# Altium PCB PCB Band Pass.PcbDoc
Units mm, origin at the board's own origin, x right, y up, seen from the top; angles counter-clockwise.
Board outline 60 x 60 mm, 2 copper layers (Top Layer, Bottom Layer); 59 components, 42 nets, 176 pads, 17 vias.
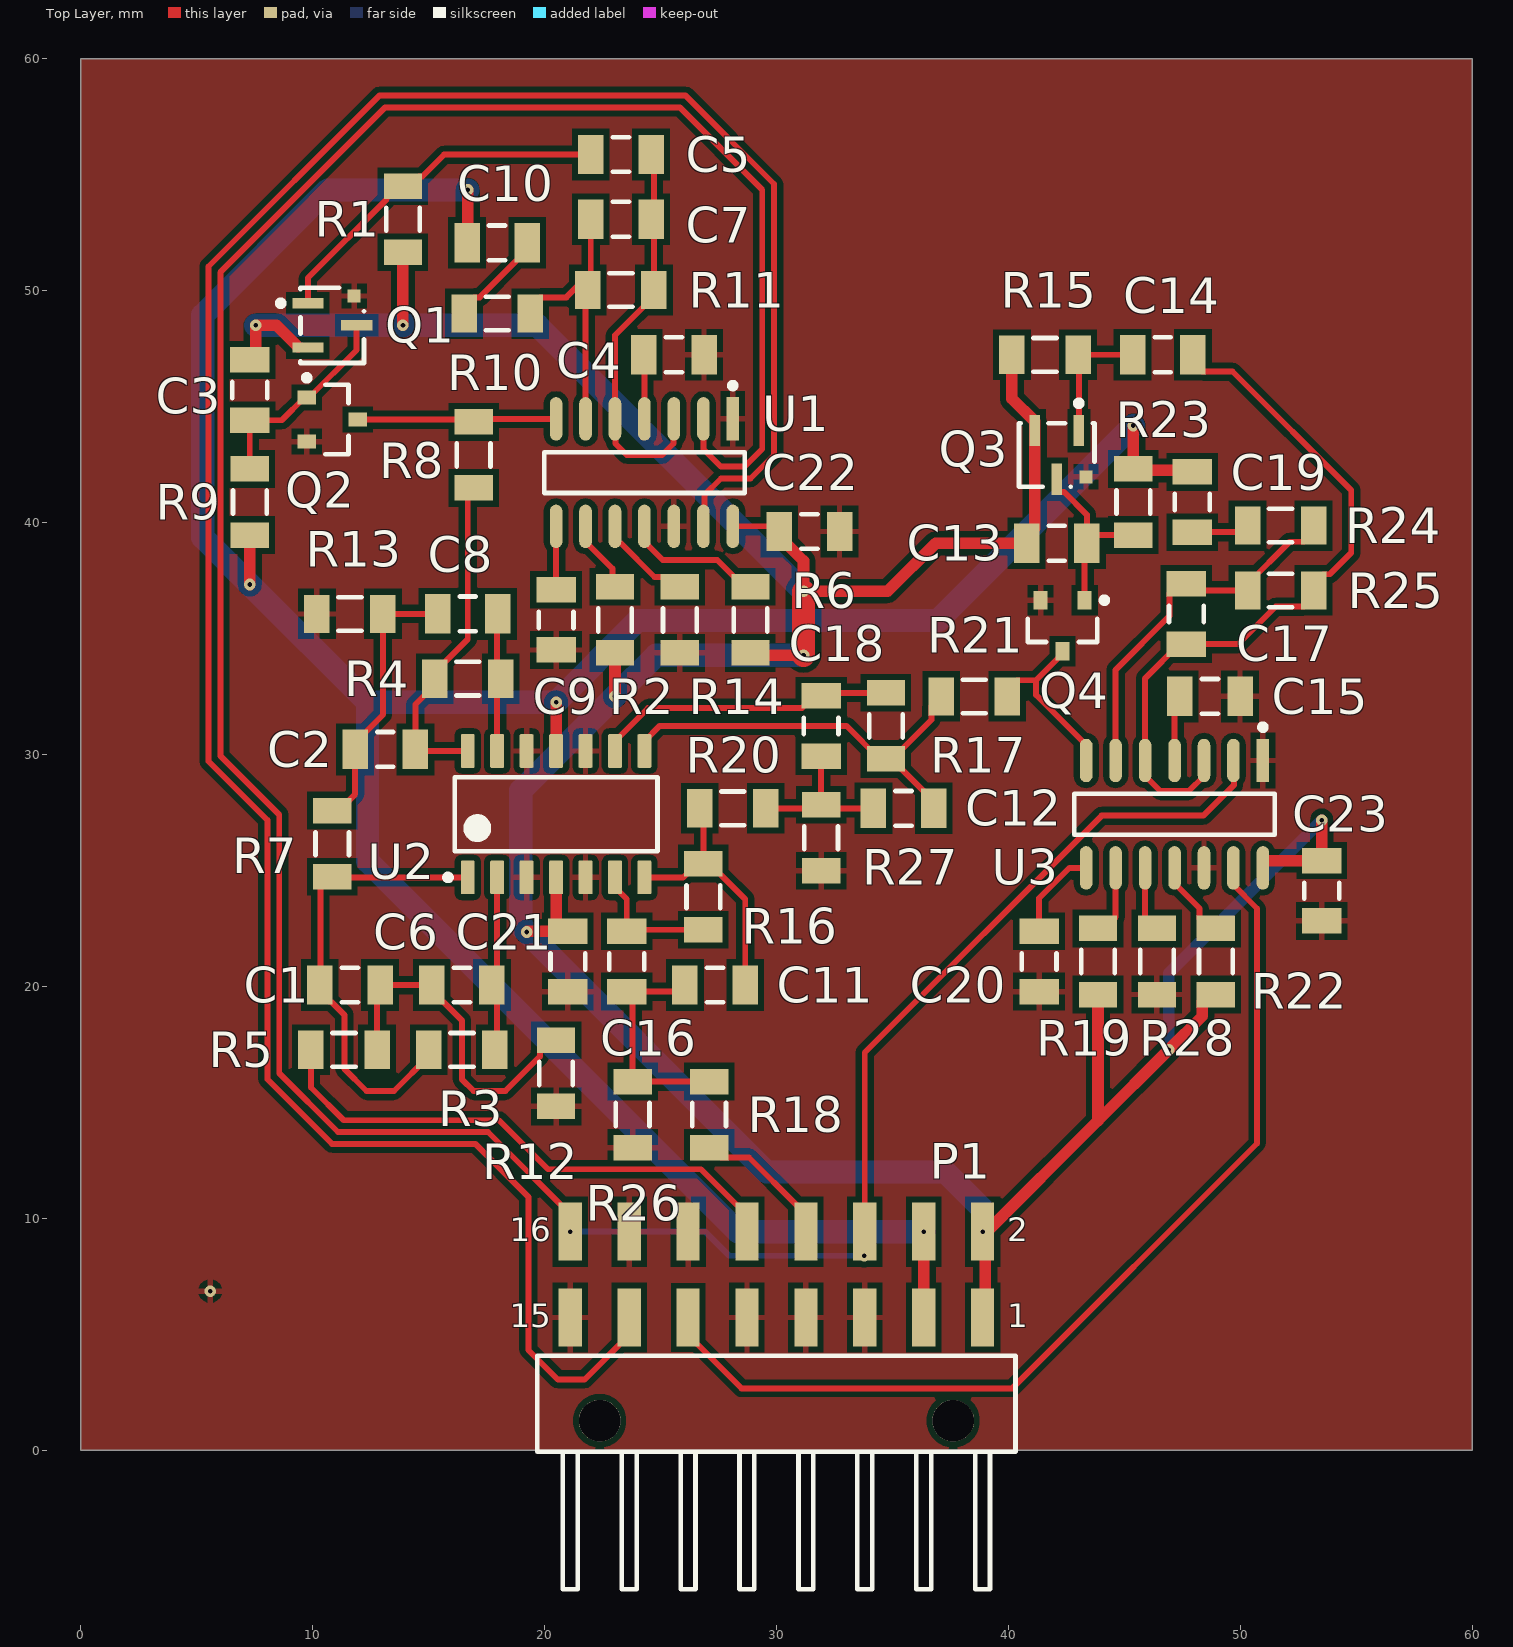
[diagram p0: Top Layer view]
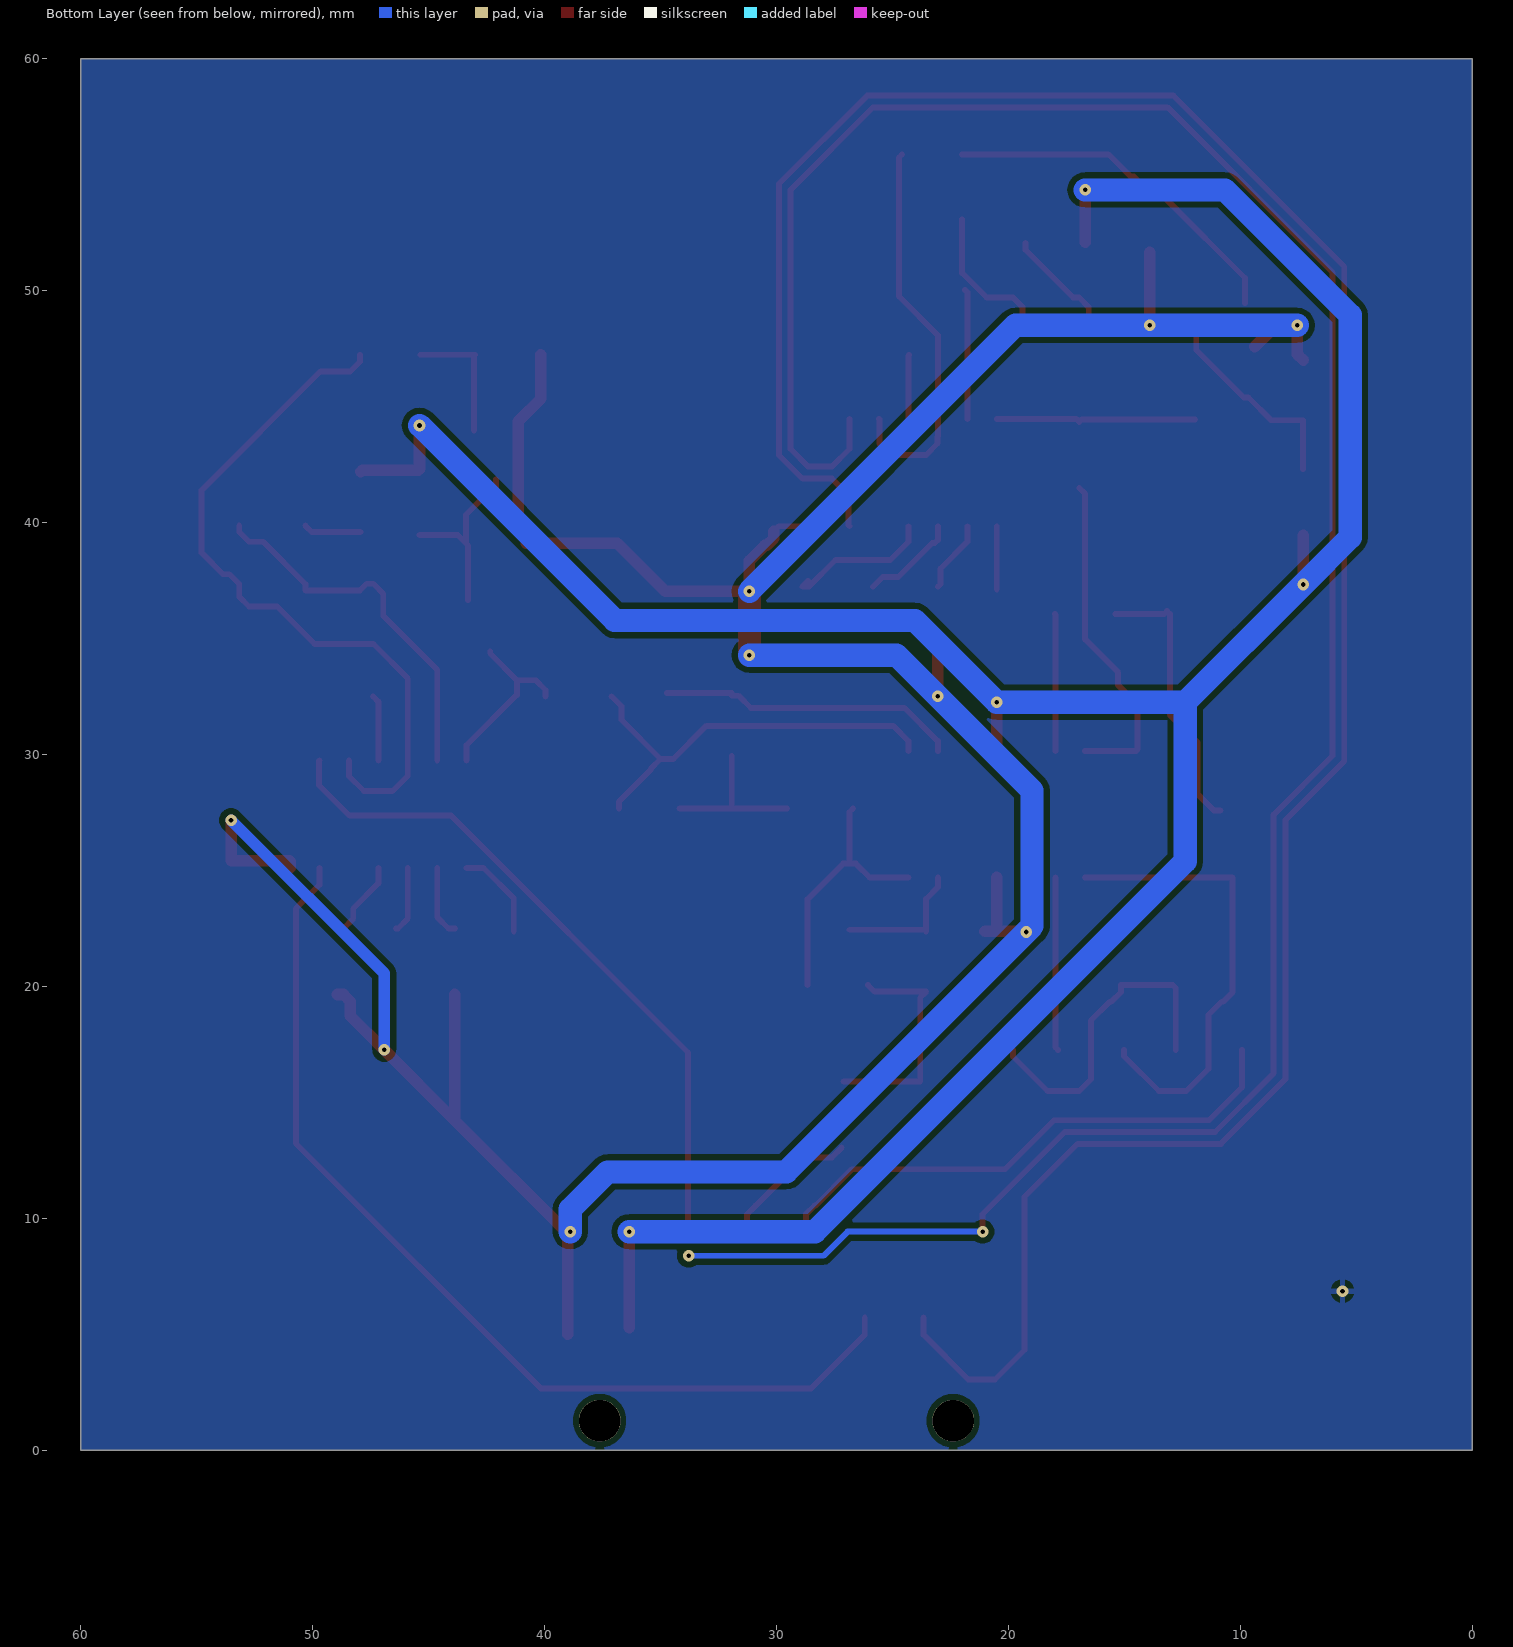
[diagram p1: Bottom Layer view, seen from below]

## Layer stack, top to bottom
Top Solder: solder mask 0.0102, Solder Resist, Dk 3.5
Top Layer: signal copper 0.0356
Dielectric 1: dielectric 0.32, FR-4, Dk 4.8
Bottom Layer: signal copper 0.0356
Bottom Solder: solder mask 0.0102, Solder Resist, Dk 3.5

## Board outline
0,0 0,60 60,60 60,0

## Design rules (kind name [scope] priority, off if disabled: settings)
Clearance [All] p1: gap=0.254 ignorepadtopadclearanceinfootprint=FALSE except(0: Arc-Hole Track-Hole SMDPad-Hole THPad-Hole Via-Hole Fill-Hole Poly-Hole Region-Hole Text-Hole)
PolygonConnect [All] p1: connectstyle=Relief reliefconductorwidth=0.254 reliefentries=4 polygonreliefangle="90 Angle" airgapwidth=0.254
RoutingVias [All] p1: holewidth=0.711 width=1.27 viastyle="Through Hole" minholewidth=0.711 minwidth=1.27 maxholewidth=0.711 maxwidth=1.27
SolderMaskExpansion [All] p1: expansion=0.102 istentingtop=FALSE
Width [All] p1: maxlimit=10 minlimit=0.254 preferedwidth=0.254 minimp=50.000000 maximp=50.000000 favimp=50.000000
30 further rules are at their usual default settings.

## Components (designator, comment, footprint, x,y, rotation, side; value= is the part's Value field where it differs from the comment)
C1 "1206GC102KAT1A" AVX-1206-2_L 11.608,20.056 r180 top
C2 "1206GC102KAT1A" AVX-1206-2_L 13.132,30.216 r0 top
C3 "1206GC102KAT1A" AVX-1206-2_L 7.29,45.71 r270 top
C4 "1206GC102KAT1A" AVX-1206-2_L 25.578,47.234 r180 top
C5 "1206GC102KAT1A" AVX-1206-2_L 23.292,55.87 r0 top
C6 "1206GC102KAT1A" AVX-1206-2_L 16.434,20.056 r0 top
C7 "1206GC102KAT1A" AVX-1206-2_L 23.292,53.076 r0 top
C8 "1206GC102KAT1A" AVX-1206-2_L 16.688,36.058 r0 top
C9 "1206GC102KAT1A" AVX-1206-2_L 20.498,35.804 r90 top
C10 "1206GC102KAT1A" AVX-1206-2_L 17.958,52.06 r0 top
C11 "1206GC102KAT1A" AVX-1206-2_L 27.356,20.056 r0 top
C12 "1206GC102KAT1A" AVX-1206-2_L 35.484,27.676 r0 top
C13 "1206GC102KAT1A" AVX-1206-2_L 42.088,39.106 r0 top
C14 "1206GC102KAT1A" AVX-1206-2_L 46.66,47.234 r0 top
C15 "1206GC102KAT1A" AVX-1206-2_L 48.692,32.502 r180 top
C16 "1206GC102KAT1A" AVX-1206-2_L 23.546,21.072 r90 top
C17 "1206GC102KAT1A" AVX-1206-2_L 47.676,36.058 r270 top
C18 "1206GC102KAT1A" AVX-1206-2_L 31.928,31.232 r90 top
C19 "1206GC102KAT1A" AVX-1206-2_L 47.93,40.884 r270 top
C20 "1206GC102KAT1A" AVX-1206-2_L 41.326,21.072 r90 top
C21 "1206GC102KAT1A" AVX-1206-2_L 21.006,21.072 r90 top
C22 "1206GC102KAT1A" AVX-1206-2_L 31.42,39.614 r180 top
C23 "1206GC102KAT1A" AVX-1206-2_L 53.518,24.12 r90 top
P1 "610116249121" 610116249121 30,2 r0 top
Q1 "2N2907AUB" FP-UB-IPC_C 10.846,48.504 r270 top
Q2 "2N7002-T1-E3" VISH-TO-236-3_A_L 10.846,44.44 r0 top
Q3 "2N2907AUB" FP-UB-IPC_C 42.088,42.916 r180 top
Q4 "2N7002-T1-E3" VISH-TO-236-3_A_L 42.342,35.55 r270 top
R1 "ERJ-8GEY0R00V" RESC3216X70X50NL05T20 13.894,53.076 r270 top
R2 "ERJ-8GEY0R00V" RESC3216X70X50NL05T20 23.038,35.804 r270 top
R3 "ERJ-8GEY0R00V" RESC3216X70X50NL05T20 16.434,17.262 r180 top
R4 "ERJ-8GEY0R00V" RESC3216X70X50NL05T20 16.688,33.264 r180 top
R5 "ERJ-8GEY0R00V" RESC3216X70X50NL05T20 11.354,17.262 r0 top
R6 "ERJ-8GEY0R00V" RESC3216X70X50NL05T20 28.88,35.804 r270 top
R7 "ERJ-8GEY0R00V" RESC3216X70X50NL05T20 10.846,26.152 r90 top
R8 "ERJ-8GEY0R00V" RESC3216X70X50NL05T20 16.942,42.916 r90 top
R9 "ERJ-8GEY0R00V" RESC3216X70X50NL05T20 7.29,40.884 r90 top
R10 "ERJ-8GEY0R00V" RESC3216X70X50NL05T20 17.958,49.012 r0 top
R11 "ERJ-8GEY0R00V" RESC3216X70X50NL05T20 23.292,50.028 r0 top
R12 "ERJ-8GEY0R00V" RESC3216X70X50NL05T20 20.498,16.246 r90 top
R13 "ERJ-8GEY0R00V" RESC3216X70X50NL05T20 11.608,36.058 r0 top
R14 "ERJ-8GEY0R00V" RESC3216X70X50NL05T20 25.832,35.804 r90 top
R15 "ERJ-8GEY0R00V" RESC3216X70X50NL05T20 41.58,47.234 r180 top
R16 "ERJ-8GEY0R00V" RESC3216X70X50NL05T20 26.848,23.866 r90 top
R17 "ERJ-8GEY0R00V" RESC3216X70X50NL05T20 34.722,31.232 r270 top
R18 "ERJ-8GEY0R00V" RESC3216X70X50NL05T20 27.102,14.468 r90 top
R19 "ERJ-8GEY0R00V" RESC3216X70X50NL05T20 43.866,21.072 r270 top
R20 "ERJ-8GEY0R00V" RESC3216X70X50NL05T20 28.118,27.676 r0 top
R21 "ERJ-8GEY0R00V" RESC3216X70X50NL05T20 38.532,32.502 r0 top
R22 "ERJ-8GEY0R00V" RESC3216X70X50NL05T20 48.946,21.072 r270 top
R23 "ERJ-8GEY0R00V" RESC3216X70X50NL05T20 45.39,40.884 r270 top
R24 "ERJ-8GEY0R00V" RESC3216X70X50NL05T20 51.74,39.868 r0 top
R25 "ERJ-8GEY0R00V" RESC3216X70X50NL05T20 51.74,37.074 r0 top
R26 "ERJ-8GEY0R00V" RESC3216X70X50NL05T20 23.8,14.468 r90 top
R27 "ERJ-8GEY0R00V" RESC3216X70X50NL05T20 31.928,26.406 r90 top
R28 "ERJ-8GEY0R00V" RESC3216X70X50NL05T20 46.406,21.072 r90 top
U1 "SSM2166SZ" FP-R-14-IPC_C 24.308,42.154 r270 top
U2 "TL074CDR" D0014A_N 20.498,27.422 r90 top
U3 "SSM2166SZ" FP-R-14-IPC_C 47.168,27.422 r270 top

## Footprints (in the part's own frame and the unit in brackets; to place one, negate y for a bottom-side part, rotate by r counter-clockwise, add the part's x,y. Pads: shape width x height; smd on the part's side, far side on the other; paste and mask are expansions set on the pad)
610116249121 [mm] "Pin Header, pitch 2.54 mm, SMD, Angled, dual row, 16p"
  rect 1x2.5 smd: 1(8.89,3.72) 2(8.89,7.42) 3(6.35,3.72) 4(6.35,7.42) 5(3.81,3.72) 6(3.81,7.42) 7(1.27,3.72) 8(1.27,7.42) 9(-1.27,3.72) 10(-1.27,7.42) 11(-3.81,3.72) 12(-3.81,7.42) 13(-6.35,3.72) 14(-6.35,7.42) 15(-8.89,3.72) 16(-8.89,7.42)
  round 1.8 hole 1.8 unplated: MH1(7.62,-0.73) MH2(-7.62,-0.73)
  silkscreen extent -10.31,-8 10.31,2.07, body extent -10.16,-8 10.16,8.16, height 5.1
AVX-1206-2_L [mm] "SMD, 2-Leads, Body 3.4x1.8mm, IPC High Density"
  rect 1.1x1.7 smd: 1(-1.3,0) 2(1.3,0)
  silkscreen extent -0.35,-0.75 0.35,0.75, body extent -1.7,-0.9 1.7,0.9, height 1.52
D0014A_N [mm] "SOIC, 14-Leads, Body 8.75x4mm, Pitch 1.27mm, IPC Medium Density"
  rrect17% 1.45x0.6 smd: 1(-2.725,3.81) 2(-2.725,2.54) 3(-2.725,1.27) 4(-2.725,0) 5(-2.725,-1.27) 6(-2.725,-2.54) 7(-2.725,-3.81) 8(2.725,-3.81) 9(2.725,-2.54) 10(2.725,-1.27) 11(2.725,0) 12(2.725,1.27) 13(2.725,2.54) 14(2.725,3.81)
  silkscreen extent -2.85,-4.38 1.6,4.78, body extent -3.02,-4.32 3.02,4.32, height 1.59
FP-R-14-IPC_C [mm]
  rect 1.874x0.542 smd paste+0 mask+0: 1(-2.316,3.81)
  rrect100% 1.874x0.542 smd paste+0 mask+0: 2(-2.316,2.54) 3(-2.316,1.27) 4(-2.316,0) 5(-2.316,-1.27) 6(-2.316,-2.54) 7(-2.316,-3.81) 8(2.316,-3.81) 9(2.316,-2.54) 10(2.316,-1.27) 11(2.316,0) 12(2.316,1.27) 13(2.316,2.54) 14(2.316,3.81)
  silkscreen extent -3.88,-4.33 0.88,4.33, body extent -3.35,-4.43 3.35,4.43, height 0.25
FP-UB-IPC_C [mm]
  rect 0.45x1.35 smd paste+0 mask+0: 1(-0.955,-1.05) 2(0.955,-1.05) 3(0,1.05)
  rect 0.559x0.559 smd paste+0 mask+0: 4(-1.263,0.945)
  silkscreen extent -1.63,-2.35 1.63,1.37, body extent -1.73,-1.83 1.73,1.83, height 0.25
RESC3216X70X50NL05T20 [mm] "Chip Resistor, 2-Leads, Body 3.20x1.60mm, IPC Medium Density"
  rect 1.1x1.65 smd: 1(-1.425,0) 2(1.425,0)
  silkscreen extent -0.5,-0.72 0.5,0.72, body extent -1.63,-0.82 1.62,0.82, height 0.7
VISH-TO-236-3_A_L [mm] "SOT-23, 3-Leads, Body 3.04x1.4mm, Pitch 0.95mm, IPC High Density"
  rect 0.8x0.6 smd: 1(-1.1,0.95) 2(-1.1,-0.95) 3(1.1,0)
  silkscreen extent -1.22,-1.5 0.7,1.92, body extent -1.32,-1.52 1.32,1.52, height 1.12

## Part data
C1 C2 C3 C4 C5 C6 C7 C8 C9 C10 C11 C12 C13 C14 C15 C16 C17 C18 C19 C20 C21 C22 C23: library part CMP-2000-05468-1, "Chip Capacitor, 1 nF, +/- 10%, -55 to 125 degC, 1206 (3216 Metric), RoHS, Tape and Reel", Capacitance=0.001uF, Case Size/Dimension=1206, Dielectric=X7R, Manufacturer=AVX, Package Description="2-Pin SMD, Body 3.4 x 1.8 mm", Rated Voltage=2000V, Tolerance=10%, Tolerance (%)=±10%, Datasheet URL=https://datasheet.ciiva.com/11787/0900766b80ed4c37-11787781.pdf, Datasheet Version=11/2010, Manufacturer URL=http://www.avx.com/, Mounting Technology=SurfaceMount, Package Reference=1206, PartNumber=1206GC102KAT1A, Voltage Rating DC=2000V
P1: library part CMP-1502-01151-2, Color=Black, Contact Resistance=20mΩ, Current Rating=3A, Operating Supply Voltage=250V, Connector Type="Male Pin", Contact Mating Length=5.9944mm, Contact Plating=Gold, Gender=Male, Lead Pitch=2.54mm, Mount="Surface Mount", NexarPartId=52645099, Number Of Contacts=16, Number of Pins=16, Number of Positions=16, Number of Rows=2, Packaging="Tape and Reel", Pitch=2.54mm, REACH SVHC=Unknown, RoHS=Compliant, Row Spacing=2.54mm, Termination=Solder
Q1 Q3: library part CMP-06567-000003-1, "TRANS PNP 60V 0.6A", Collector Base Voltage=60V, Collector Emitter Saturation Voltage=1.6V, Emitter Base Voltage=5V, Manufacturer=Microsemi, Max Collector Current=600mA, Max Junction Temp=+200°C, Package=UB, Power Dissipation=0.5W, Temperature="-65°C to +200°C", Temperature Range Low=-65°C, Automotive=No, Category=Trans, Collector Emitter Breakdown Voltage=60V, Collector Emitter Voltage=60V, ComponentLink2Description=Datasheet, ComponentLink2URL=https://www.microsemi.com/document-portal/doc_download/8896-lds-0059-datasheet, Device Class L1="Discrete Semiconductors", Device Class L2=Transistors, Device Class L3=BJTs, Digikey Description="TRANS PNP 60V 0.6A", Height=1.42mm, Hfe Max=300, Hfe Min=100, Hfe Ss Min=100, Hfe Ss Testic=1mA, Hfe Ss Testvce=10V, Hfe Testic=150mA, Hfe Testvce=10V, Lead Free=Yes, Manufacturer Part Number=2N2907AUB, Mouser Description="Bipolar Transistors - BJT Small-Signal BJT", Number of Elements=1, Number Of Pnp=1, Octopart=https://octopart.com/2n2907aub-microsemi-2441590, RoHS=TRUE, Temperature Range High=+200°C
Q2 Q4: library part CMP-2000-05565-1, "N-Channel MOSFET, 115 mA, 60 V, -55 to 150 degC, 3-Pin SOT23, RoHS, Tape and Reel", Continuous Drain Current Id=115mA, Drain Source Voltage Vds=60V, Manufacturer=Vishay, On Resistance Rds(on)=7.5ohm, Operating Temperature Max=150°C, Package Description="3-Pin Small Outline Transistor, Body 2.92 x 1.3 mm, Pitch 0.95 mm", Package Reference=TO-236-3, Power Dissipation Pd=200mW, Rds(on) Test Voltage Vgs=10V, Threshold Voltage Vgs=2.1V, Transistor Case Style=TO-236, Datasheet URL=http://www.vishay.com/docs/70226/70226.pdf, Datasheet Version="Rev. F, 07/2001", Manufacturer URL=http://www.vishay.com/, Mounting Technology=SurfaceMount, MSL=MSL1-Unlimited, No. of Pins=3, Package URL=http://www.vishay.com/docs/71196/71196.pdf, SVHC=NoSVHC(17-Dec-2014), Transistor Polarity=NChannel
R1 R2 R3 R4 R5 R6 R7 R8 R9 R10 R11 R12 R13 R14 R15 R16 R17 R18 R19 R20 R21 R22 R23 R24 R25 R26 R27 R28: library part CMP-2003-00541-1, Manufacturer=Panasonic, Part Number=ERJ-8GEY0R00V
U1 U3: library part CMP-09115-000002-1, "IC AMP CLASS AB MONO 14SOIC", Case/Package=SOIC, Max Operating Temperature=85°C, Max Supply Current=10mA, Max Supply Voltage=5.5V, Min Operating Temperature=-40°C, Min Supply Voltage=4.5V, Operating Supply Voltage=5V, Package Quantity=56, Power Supply Rejection Ratio (PSRR)=50dB, Quiescent Current=7.5mA, Voltage Gain=60dB, Bandwidth=20MHz, Contact Plating=Tin, Gain=60dB, Gain Bandwidth Product=30MHz, Height=1.5mm, Lead Free="Contains Lead", Length=8.75mm, Load Impedance=75R, Mount="Surface Mount", Nominal Supply Current=10mA, Number of Amplifiers=1, Number of Channels=1, Number of Pins=14, Operating Supply Current=10mA, Packaging=Rail/Tube, Radiation Hardening=No, REACH SVHC="No SVHC", RoHS Compliant=Yes, Series=-, Supply Current=7.5mA, Supply Type=Single, Unity Gain Bandwidth Product=30MHz, Width=4mm
U2: library part CMP-0017-00003-2, "Quad Low-Noise JFET-Input General-Purpose Operational Amplifier, 7 to 36 V, 0 to 70 degC, 14-pin SOIC (D14), Green (RoHS & no Sb/Br)", Manufacturer="Texas Instruments", Rating=Military, Total Supply Voltage(Max)(+5V is 5, +/-5V is 10)=36, Total Supply Voltage(Min)(+5V is 5, +/-5V is 10)=7, CMRR(Min)(dB)=70, Code_JEDEC=MS-012, ComponentLink1Description="Manufacturer URL", ComponentLink1URL=http://www.ti.com/, ComponentLink2Description=Datasheet, ComponentLink2URL=http://www.ti.com/lit/ds/symlink/tl074.pdf, ComponentLink3Description="Package Specification", ComponentLink3URL=http://www.ti.com/lit/ml/mpds177g/mpds177g.pdf, DatasheetVersion=SLOS080J, Eco-Plan="Green (RoHS & no Sb/Br)", GBW(Typ)(MHz)=3, IIB(Max)(pA)=200, Iq per channel(Max)(mA)=2.5, Mounting Technology="Surface Mount", Number of Channels=4, Offset Drift(Typ)(uV/C)=18, PackageDescription="14-Pin Plastic Small Outline, Body 8.65 x 3.90 mm, Pitch 1.27 mm", PackageReference=D0014A, PackageVersion="4040047-5/M, 06/2011", PartNumber=TL074CDR, Slew Rate(Typ)(V/us)=13, Sub Family="General Purpose Amplifier, High Supply Voltage Amplifier (>=30V)", Vio (25C)(Max)(mV)=10, Vn at 1kHz(Typ)(nV/rtHz)=18

## Via types
v1: diameter 0.5, hole 0.2, Top Layer to Bottom Layer, tented both sides, 17 vias

## Nets (pads, with @x,y where several pads share a name; then routed paths per layer and width w, separated by ;. In a path a pad name is that pad's centre, name@x,y a point inside that pad or via, vN(x,y) a via of type N, cw(c..) or ccw(c..) an arc to the next point about the centre after c; other vN are vias at no path point)
"AGC Data": P1.6 P1.16 U1.2 U3.2 | length 137.4
  Top Layer w0.254: v1(21.11,9.42) 21.11,10.17 17.564,13.716 11.09,13.716 8.56,16.246 8.56,27.404 6.02,29.944 6.02,50.79 13.132,57.902 25.832,57.902 29.388,54.346 29.388,43.17 28.626,42.408 27.61,42.408 26.848,43.17 U1.2 ; P1.6 33.81,17.146 44.022,27.358 48.409,27.358 49.725,28.675 49.725,29.721 U3.2
  Bottom Layer w0.254: v1(21.11,9.42) 26.927,9.42 27.965,8.382 v1(33.782,8.382)
"AGC In L": Q2.3 R8.2 U1.7 | length 8.6
  Top Layer w0.254: Q2.3 16.843,44.44 R8.2 17.071,44.47 U1.7
"AGC In R": Q4.3 R21.2 U3.7 | length 7.8
  Top Layer w0.254: R21.2 39.957,32.777 40.38,33.2 41.192,33.2 ; Q4.3 42.342,34.35 41.192,33.2 ; U3.7 43.358,30.404 41.192,32.57 41.192,33.2
"AGC neg L": C7.1 R10.2 R11.1 U1.6 | length 11.4
  Top Layer w0.254: R10.2 19.383,49.287 19.806,49.71 20.942,49.71 21.992,50.76 C7.1 ; U1.6 21.768,49.929 R11.1
"AGC neg R": C17.1 R24.2 R25.1 U3.6 | length 16.1
  Top Layer w0.254: U3.6 44.628,33.649 46.953,35.974 46.953,36.935 47.376,37.358 C17.1 47.96,37.074 R25.1 50.315,37.349 52.136,39.17 52.742,39.17 53.165,39.593 R24.2
"AGC Out L": C5.2 C7.2 R11.2 U1.3 U1.5 | length 17.2
  Top Layer w0.254: C5.2 24.717,55.745 R11.2 24.717,49.753 23.038,48.074 23.038,43.726 23.055,43.709 23.055,43.407 23.546,42.916 25.07,42.916 25.561,43.407 25.561,44.453 U1.3
"AGC Out R": C14.2 C17.2 R25.2 U3.3 U3.5 | length 31.5
  Top Layer w0.254: C14.2 47.96,46.934 48.383,46.511 49.669,46.511 54.788,41.392 54.788,38.697 53.863,37.772 53.588,37.772 53.165,37.349 R25.2 53.165,36.799 52.742,36.376 51.531,36.376 49.913,34.758 C17.2 47.376,34.758 45.898,33.28 U3.5 45.898,29.072 46.55,28.42 47.786,28.42 48.438,29.072 U3.3
GND: C4.1 C9.1 C15.1 C20.1 C21.1 C22.1 C23.1 P1.5 P1.7 P1.9 P1.12 P1.14 P1.15 Q1.4 Q2.2 Q3.4 Q4.2 R12.1 R13.1 R14.1 R26.1 R27.1 R28.1 U1.1 U1.12 U2.3 U2.5 U2.10 U2.12 U3.1 U3.12
  other v1: 5.588,6.858
InputL: P1.10 R5.1 | length 23.4
  Top Layer w0.254: R5.1 9.929,15.639 11.344,14.224 18.034,14.224 20.146,12.112 26.75,12.112 28.319,10.543 28.357,10.543 28.73,10.17 P1.10
InputR: P1.8 R18.1 | length 6
  Top Layer w0.254: R18.1@27.187,13.043 27.61,12.62 28.82,12.62 P1.8@30.897,10.543 ; P1.8@30.897,10.543 31.27,10.17 P1.8
NetC1_1: C1.1 C6.1 R5.2 R12.2 | length 15.1
  Top Layer w0.254: R5.2 12.779,19.927 C1.1 C6.1 15.134,19.756 15.557,19.333 15.633,19.333 16.434,18.532 16.434,15.992 16.942,15.484 18.311,15.484 19.8,16.973 19.8,17.248 20.223,17.671 R12.2
NetC1_2: C1.2 R3.2 R7.1 U2.1 | length 20
  Top Layer w0.254: R3.2 15.009,16.987 13.506,15.484 12.326,15.484 11.368,16.442 11.368,18.772 10.807,19.333 10.731,19.333 10.338,19.726 10.338,24.697 U2.1
NetC2_1: C2.1 C8.1 R7.2 R13.2 | length 11.8
  Top Layer w0.254: R7.2 11.121,27.577 11.832,28.288 C2.1 11.832,30.516 13.033,31.717 R13.2 ; R13.2@13.16,36.185 13.287,36.058 C8.1
NetC2_2: C2.2 R4.2 R8.1 U2.14 | length 14.6
  Top Layer w0.254: U2.14 14.501,30.147 C2.2 14.432,32.158 15.263,32.989 R4.2 15.263,33.539 16.688,34.964 16.688,41.237 R8.1
NetC3_2: C3.2 Q1.3 Q2.1 R9.2 | length 9
  Top Layer w0.254: R9.2 C3.2 8.666,44.41 9.646,45.39 Q2.1 9.846,45.39 11.896,47.44 Q1.3
NetC4_2: C4.2 U1.4 | length 2.8
  Top Layer w0.254: C4.2 24.308,47.204 U1.4
NetC5_1: C5.1 Q1.1 R1.1 | length 15.6
  Top Layer w0.254: Q1.1 9.796,50.544 13.196,53.944 13.196,54.078 13.288,54.17 13.972,54.17 13.972,54.304 14.592,54.924 14.726,54.924 15.672,55.87 C5.1
NetC6_2: C6.2 R3.1 U2.2 | length 7.5
  Top Layer w0.254: R3.1 17.958,17.361 U2.2
NetC8_2: C8.2 R4.1 U2.13 | length 5.9
  Top Layer w0.254: U2.13 17.958,36.028 C8.2
NetC9_2: C9.2 U1.8 | length 2.7
  Top Layer w0.254: C9.2 U1.8
NetC10_2: C10.2 R10.1 | length 4.3
  Top Layer w0.254: R10.1 16.533,49.287 16.956,49.71 17.208,49.71 19.258,51.76 C10.2
NetC11_1: C11.1 C16.1 R18.2 R26.2 | length 9.9
  Top Layer w0.254: C11.1 25.772,19.772 C16.1 23.8,19.518 R26.2 R18.2
NetC11_2: C11.2 R16.2 R20.1 U2.7 | length 11.4
  Top Layer w0.254: U2.7 25.979,24.697 26.573,25.291 R16.2 ; R20.1 26.848,27.521 R16.2 ; C11.2 28.656,23.758 27.123,25.291 R16.2
NetC12_1: C12.1 C18.1 R20.2 R27.2 | length 6.7
  Top Layer w0.254: R20.2 C12.1 ; R27.2 C18.1
NetC12_2: C12.2 R17.2 R21.1 U2.8 | length 18.4
  Top Layer w0.254: U2.8 24.308,30.572 24.968,31.232 33.022,31.232 34.447,29.807 R17.2 R17.2@34.997,29.807 ; C12.2 36.784,27.976 35.42,29.34 35.42,29.384 R17.2@34.997,29.807 ; R21.1 36.684,32.079 36.684,31.494 R17.2@34.997,29.807
NetC13_2: C13.2 Q3.3 Q4.1 R23.2 | length 8.1
  Top Layer w0.254: Q3.3 42.088,41.416 42.186,41.318 42.407,41.318 43.388,40.337 C13.2 ; Q4.1 43.292,39.01 C13.2 ; R23.2 43.741,39.459 C13.2
NetC14_1: C14.1 Q3.1 R15.1 | length 5.6
  Top Layer w0.254: Q3.1 43.043,47.196 R15.1 C14.1
NetC15_2: C15.2 U3.4 | length 2.9
  Top Layer w0.254: U3.4 47.168,32.278 C15.2
NetC16_2: C16.2 R16.1 U2.6 | length 5.9
  Top Layer w0.254: U2.6 23.038,24.272 23.546,23.764 C16.2 23.615,22.441 R16.1
NetC18_2: C18.2 R17.1 U2.9 | length 12.9
  Top Layer w0.254: U2.9 23.038,30.572 24.47,32.004 31.1,32.004 31.628,32.532 C18.2 ; C18.2@31.928,32.657 R17.1
NetC19_2: C19.2 R24.1 | length 2.5
  Top Layer w0.254: C19.2 50.031,39.584 R24.1
NetC20_2: C20.2 U3.8 | length 4
  Top Layer w0.254: C20.2 41.326,23.8 42.632,25.106 U3.8
NetR2_1: R2.1 U1.9 | length 3.1
  Top Layer w0.254: U1.9 21.768,39.172 22.929,38.011 22.929,37.338 R2.1
NetR6_1: R6.1 U1.11 | length 6.4
  Top Layer w0.254: U1.11 24.308,39.172 25.096,38.384 27.45,38.384 28.605,37.229 R6.1 R6.1@28.626,37.483
NetR14_2: R14.2 U1.10 | length 4.2
  Top Layer w0.254: U1.10 23.038,39.25 23.171,39.117 23.281,39.117 24.746,37.652 25.409,37.652 R14.2
NetR19_1: R19.1 U3.9 | length 3.1
  Top Layer w0.254: R19.1 44.141,22.497 44.628,22.984 U3.9
NetR22_1: R22.1 U3.11 | length 3.5
  Top Layer w0.254: U3.11 47.168,24.44 48.248,23.36 48.248,22.92 48.671,22.497 R22.1
NetR28_2: R28.2 U3.10 | length 2.9
  Top Layer w0.254: U3.10 45.898,22.92 46.321,22.497 R28.2
OutputL: P1.13 U1.13 | length 108.3
  Top Layer w0.254: P1.13 23.65,4.97 21.728,3.048 20.574,3.048 19.304,4.318 19.304,10.922 17.018,13.208 10.836,13.208 8.052,15.992 8.052,27.168 5.512,29.708 5.512,51.044 12.878,58.41 26.086,58.41 29.896,54.6 29.896,42.916 28.88,41.9 27.61,41.9 26.891,41.181 26.891,39.881 U1.13
OutputR: P1.11 U3.13 | length 42.9
  Top Layer w0.254: P1.11 26.19,4.97 28.497,2.663 40.163,2.663 50.724,13.224 50.724,23.358 49.708,24.374 U3.13
VCC: C3.1 C13.1 C21.2 C22.2 C23.2 P1.1 P1.2 Q1.2 Q3.2 R1.2 R2.2 R6.2 R15.2 R19.2 R22.2 U1.14 U2.4 U3.14 | length 158.7
  Top Layer w0.254: U1.14 29.896,39.838 C22.2
  Top Layer w0.5: C3.1 7.544,47.264 v1(7.544,48.504) 8.441,48.504 Q1.2@9.371,47.574 ; v1(13.894,48.504) R1.2 ; v1(19.228,22.342) 19.258,22.372 C21.2@20.498,22.372 ; U2.4 C21.2@20.498,22.372 ; C21.2 C21.2@20.498,22.372 ; v1(23.038,32.502) R2.2 ; R6.2 28.979,34.28 v1(31.166,34.28) ; C22.2 30.12,39.314 30.42,39.014 30.496,39.014 31.166,38.344 v1(31.166,37.031) 34.789,37.031 36.865,39.106 C13.1 40.788,39.406 41.133,39.751 Q3.2 41.133,44.366 40.155,45.344 R15.2 ; P1.1@39,5 39,9.348 43.866,14.214 ; R19.2 43.866,14.214 ; R22.2 48.671,19.647 48.371,19.347 48.371,18.719 v1(46.914,17.262) 43.866,14.214 ; U3.14 50.978,25.401 50.997,25.42 C23.2 v1(53.518,27.168)
  Top Layer w1: v1(31.166,34.28) v1(31.166,37.031)
  Bottom Layer w0.5: v1(46.914,17.262) 46.914,20.564 v1(53.518,27.168)
  Bottom Layer w1: v1(7.544,48.504) v1(13.894,48.504) 19.693,48.504 v1(31.166,37.031) ; v1(31.166,34.28) 24.816,34.28 v1(23.038,32.502) 18.974,28.438 18.974,22.596 v1(19.228,22.342) 29.57,12 37.276,12 38.89,10.386 v1(38.89,9.42)
VEE: C10.1 C19.1 P1.3 P1.4 R9.1 R23.1 U2.11 | length 123.8
  Top Layer w0.5: v1(7.29,37.328) R9.1 ; C10.1@16.688,52.09 v1(16.688,54.346) ; U2.11 v1(20.498,32.248) ; P1.3@36.35,5.285 v1(36.35,9.42) ; v1(45.39,44.186) R23.1 45.453,42.246 47.868,42.246 C19.1
  Bottom Layer w1: v1(16.688,54.346) 10.658,54.346 5.258,48.946 5.258,39.36 v1(7.29,37.328) 12.37,32.248 ; v1(36.35,9.42) 28.34,9.42 12.37,25.39 12.37,32.248 ; v1(45.39,44.186) 36.981,35.777 24.027,35.777 v1(20.498,32.248) 12.37,32.248
pads on no net: P1.MH1 P1.MH2

## Polygon pours and split planes (outlines as drawn)
GND on Top Layer "NONET_L-01_P-001" (solid, remove dead copper, pour order 0): 0,0 0,60 60,60 60,0
GND on Bottom Layer "NONET_L-01_P-001" (solid, remove dead copper, pour order 1): 0,0 0,60 60,60 60,0

## Silkscreen, mask and mechanical layers (free items; w line width, h text height)
Mechanical 1:
  the board outline again, w0.25

## Text inside footprints (layer, text, board x,y; h text height)
P1: Top Overlay "1" at 39.95,5.3 h1.02; Top Overlay "2" at 39.95,9 h1.02; Top Overlay "16" at 18.49,9 h1.02; Top Overlay "15" at 18.49,5.3 h1.02